# Altium PCB STM32F103C8T6核心板_2020-09-11_10-32-26.pcbdoc
Units mil, origin at the board's own origin, x right, y up, seen from the top; angles counter-clockwise.
Board outline 4393 x 3568 mil, 2 copper layers (Top Layer, Bottom Layer); 1 components, 0 nets, 40 pads, 0 vias.
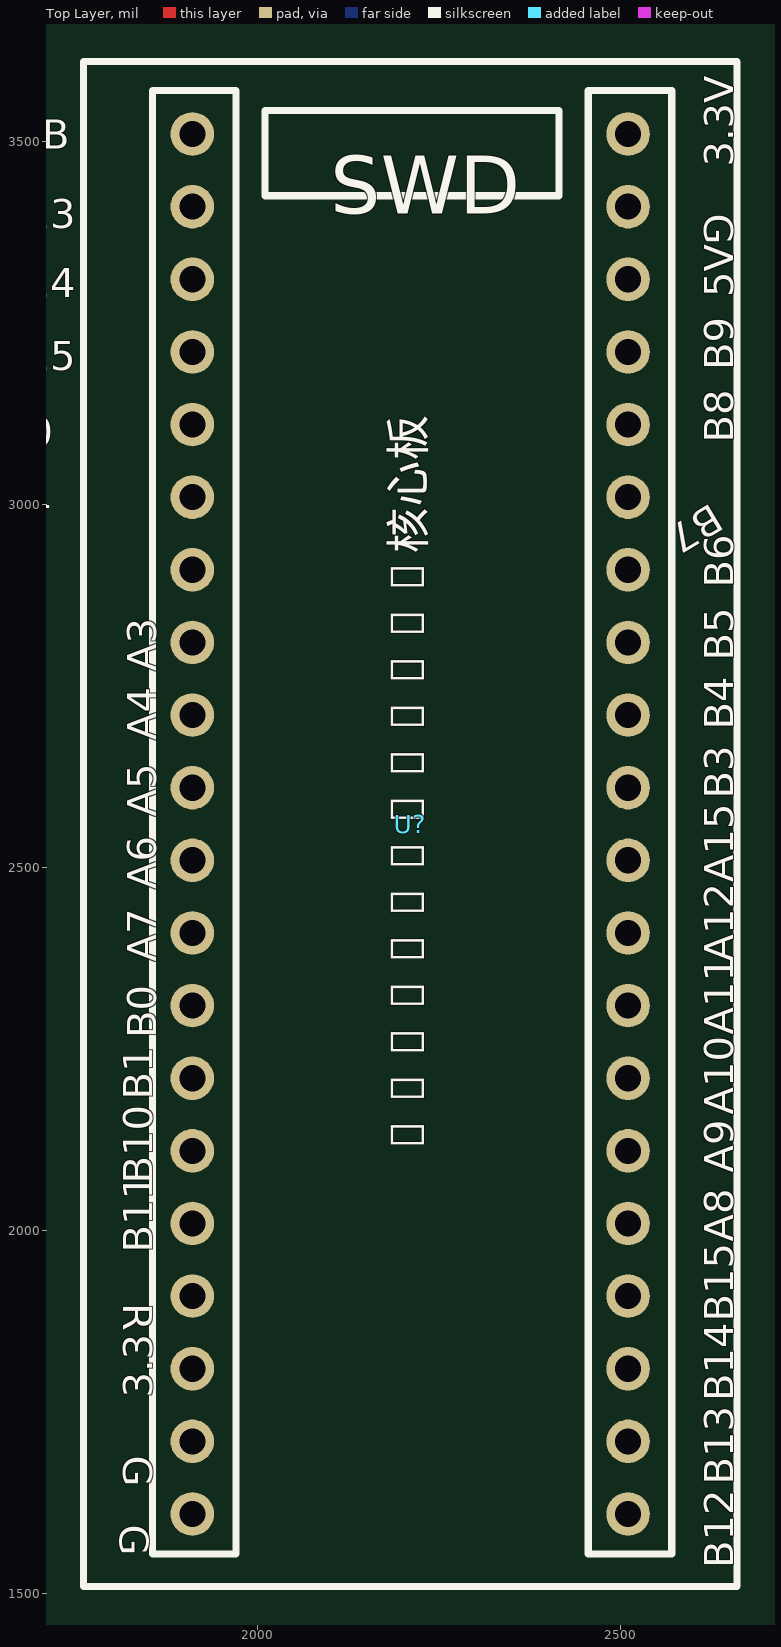
[diagram p0: Top Layer view]
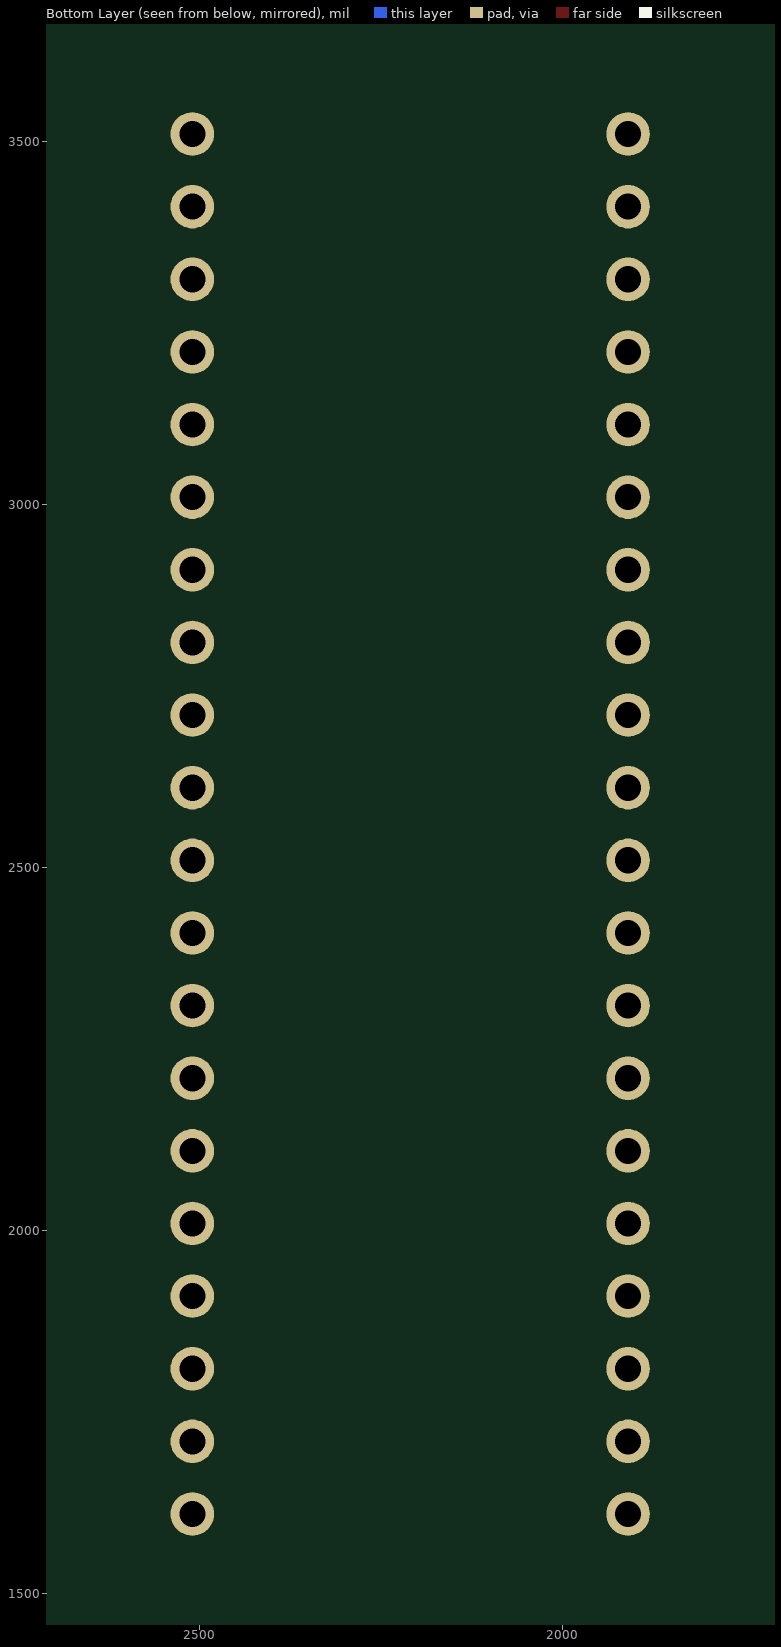
[diagram p1: Bottom Layer view, seen from below]

## Layer stack, top to bottom
Top Solder: solder mask 0.4, Solder Resist, Dk 3.5
Top Layer: signal copper 1.4
Dielectric1: dielectric 12.6, FR-4, Dk 4.8
Bottom Layer: signal copper 1.4
Bottom Solder: solder mask 0.4, Solder Resist, Dk 3.5

## Board outline
5393,1000 1000,1000 1000,4568 5393,4568

## Design rules (kind name [scope] priority, off if disabled: settings)
Clearance [All] p1: gap=10
PolygonConnect [All] p1: connectstyle=Relief reliefconductorwidth=10 reliefentries=4 polygonreliefangle="90 Angle" airgapwidth=10
RoutingVias [All] p1: holewidth=28 width=50 viastyle="Through Hole" minholewidth=28 minwidth=50 maxholewidth=28 maxwidth=50
SolderMaskExpansion [All] p1: expansion=4
Width [All] p1: maxlimit=10 minlimit=10 preferedwidth=10
30 further rules are at their usual default settings.

## Components (designator, comment, footprint, x,y, rotation, side; value= is the part's Value field where it differs from the comment)
U? "STM32F103C8T6核心板" ? 3411.5,2784 r0 top

## Footprints (in the part's own frame and the unit in brackets; to place one, negate y for a bottom-side part, rotate by r counter-clockwise, add the part's x,y. Pads: shape width x height; smd on the part's side, far side on the other; paste and mask are expansions set on the pad)
? [mil]
  round 60 hole 36: 1(-1501.5,726) 2(-1501.5,626) 3(-1501.5,526) 4(-1501.5,426) 5(-1501.5,326) 6(-1501.5,226) 7(-1501.5,126) 8(-1501.5,26) 9(-1501.5,-74) 10(-1501.5,-174) 11(-1501.5,-274) 12(-1501.5,-374) 13(-1501.5,-474) 14(-1501.5,-574) 15(-1501.5,-674) 16(-1501.5,-774) 17(-1501.5,-874) 18(-1501.5,-974) 19(-1501.5,-1074) 20(-1501.5,-1174) 21(-901.5,-1174) 22(-901.5,-1074) 23(-901.5,-974) 24(-901.5,-874) 25(-901.5,-774) 26(-901.5,-674) 27(-901.5,-574) 28(-901.5,-474) 29(-901.5,-374) 30(-901.5,-274) 31(-901.5,-174) 32(-901.5,-74) 33(-901.5,26) 34(-901.5,126) 35(-901.5,226) 36(-901.5,326) 37(-901.5,426) 38(-901.5,526) 39(-901.5,626) 40(-901.5,726)
  silkscreen extent -1652,-1274 -752,826

## Nets (pads, with @x,y where several pads share a name; then routed paths per layer and width w, separated by ;. In a path a pad name is that pad's centre, name@x,y a point inside that pad or via, vN(x,y) a via of type N, cw(c..) or ccw(c..) an arc to the next point about the centre after c; other vN are vias at no path point)
pads on no net: U?.1 U?.2 U?.3 U?.4 U?.5 U?.6 U?.7 U?.8 U?.9 U?.10 U?.11 U?.12 U?.13 U?.14 U?.15 U?.16 U?.17 U?.18 U?.19 U?.20 U?.21 U?.22 U?.23 U?.24 U?.25 U?.26 U?.27 U?.28 U?.29 U?.30 U?.31 U?.32 U?.33 U?.34 U?.35 U?.36 U?.37 U?.38 U?.39 U?.40

## Silkscreen, mask and mechanical layers (free items; w line width, h text height)
Document:
  lines w0.1: 3195.5,2783 3197.5,2785

## Text inside footprints (layer, text, board x,y; h text height)
U?: Top Overlay "SWD" at 2100,3400 h80; Top Overlay "G" at 1810,1595 h40 r270; Top Overlay "3.3" at 1855,1770 h40 r90; Top Overlay "R" at 1815,1900 h40 r270; Top Overlay "B11" at 1855,1970 h40 r90; Top Overlay "B10" at 1855,2065 h40 r90; Top Overlay "B1" at 1855,2180 h40 r90; Top Overlay "B0" at 1860,2265 h40 r90; Top Overlay "A7" at 1860,2370 h40 r90; Top Overlay "A6" at 1860,2470 h40 r90; Top Overlay "A5" at 1860,2570 h40 r90; Top Overlay "A4" at 1860,2675 h40 r90; Top Overlay "A3" at 1860,2770 h40 r90; Top Overlay "A2" at 1640,2895 h40; Top Overlay "A1" at 1645,2995 h40; Top Overlay "A0" at 1645,3080 h40; Top Overlay "C15" at 1640,3185 h40; Top Overlay "C14" at 1640,3285 h40; Top Overlay "C13" at 1640,3380 h40; Top Overlay "VB" at 1665,3490 h40; Top Overlay "B12" at 2655,1535 h40 r90; Top Overlay "B13" at 2655,1650 h40 r90; Top Overlay "B14" at 2655,1765 h40 r90; Top Overlay "B15" at 2655,1875 h40 r90; Top Overlay "A8" at 2655,1985 h40 r90; Top Overlay "A9" at 2655,2080 h40 r90; Top Overlay "A10" at 2655,2160 h40 r90; Top Overlay "A11" at 2655,2270 h40 r90; Top Overlay "A12" at 2655,2370 h40 r90; Top Overlay "A15" at 2655,2480 h40 r90; Top Overlay "B3" at 2655,2595 h40 r90; Top Overlay "B4" at 2655,2690 h40 r90; Top Overlay "B5" at 2655,2785 h40 r90; Top Overlay "B6" at 2655,2885 h40 r90; Top Overlay "B7" at 2624.7,3002.14 h40 r211; Top Overlay "B8" at 2655,3085 h40 r90; Top Overlay "B9" at 2655,3185 h40 r90; Top Overlay "5V" at 2655,3285 h40 r90; Top Overlay "G" at 2615,3400 h40 r270; Top Overlay "3.3V" at 2655,3465 h40 r90; Top Overlay "G" at 1815,1690 h40 r270